# EAGLE board SOIC14-TSSOP14 v1.0 (EAGLE 7.2.0)
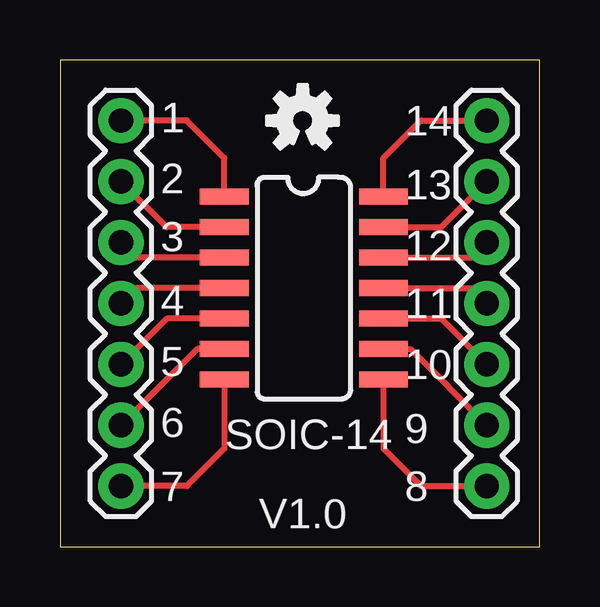
[diagram p0: board, top side]
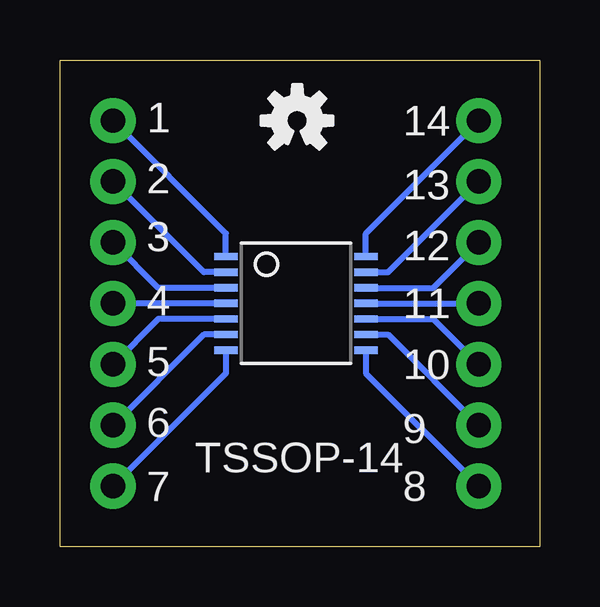
[diagram p1: board, bottom side, seen from below]

Size 19.99 x 20.31 mm. Coordinates in mm from the lower left corner, seen from the top.
Outline: 0,0 19.99,0 19.99,20.31 0,20.31 0,0
Copper layers (1*16): Top 0.035mm / dielectric 1.5mm / Bottom 0.035mm
Design rules "dirt_cheap_dirty_boards.v1": minimum track width 5mil, minimum drill 12mil, track to track 5mil, track to pad 5mil, pad to pad 5mil, via to via 5mil, smd to smd 0mil, copper to edge 10mil, drill to drill 10mil, minimum pad ring 10mil, minimum via ring 6mil, stop-mask expansion 2mil, vias tented up to drill 25mil, thermal gap 10mil

## Footprints (pad centres in the part's own frame; a part is rotated, then mirrored left to right if it is on the bottom)
1X07 = drill 1.016 pad 1.88: 1 0,0; 2 2.54,0; 3 5.08,0; 4 7.62,0; 5 10.16,0; 6 12.7,0; 7 15.24,0
SOIC-14 = smd 0.66 x 2.032: 1 -4.445,-3.315; 2 -3.175,-3.315; 3 -1.905,-3.315; 4 -0.635,-3.315; 5 0.635,-3.315; 6 1.905,-3.315; 7 3.175,-3.315; 8 3.175,3.315; 9 1.905,3.315; 10 0.635,3.315; 11 -0.635,3.315; 12 -1.905,3.315; 13 -3.175,3.315; 14 -4.445,3.315
TSSOP14 = smd 0.305 x 0.991: 1 -1.95,-2.918; 2 -1.3,-2.918; 3 -0.65,-2.918; 4 0,-2.918; 5 0.65,-2.918; 6 1.3,-2.918; 7 1.95,-2.918; 8 1.95,2.918; 9 1.3,2.918; 10 0.65,2.918; 11 0,2.918; 12 -0.65,2.918; 13 -1.3,2.918; 14 -1.95,2.918

## Placement (x,y rotation side)
FRAME1  FRAME-LETTER  [CREATIVE_COMMONS]  -9.65,-10.36 0 top  (outside the outline)
JP1  [1X07]  2.54,2.54 90 top
JP2  [1X07]  17.78,2.54 90 top
U$1  SOIC-14  [SOIC-14]  10.16,10.16 270 top
U$2  TSSOP-14  [TSSOP14]  10.16,10.16 270 bottom
U$3  [OSHW-LOGO-S]  10.11,17.78 0 top
U$4  [OSHW-LOGO-S]  10.11,17.78 0 bottom

## Library data of the parts
FRAME1 U$3 U$4 = SparkFun-Aesthetics
JP1 JP2 = SparkFun-Connectors
U$1 U$2 = Kevin-GenericICFootprints

## Nets
N$1: JP1.7 U$1.1 U$2.14
N$2: JP1.6 U$1.2 U$2.13
N$3: JP1.5 U$1.3 U$2.12
N$4: JP1.4 U$1.4 U$2.11
N$5: JP1.3 U$1.5 U$2.10
N$6: JP1.2 U$1.6 U$2.9
N$7: JP1.1 U$1.7 U$2.8
N$11: JP2.7 U$1.14 U$2.1
N$12: JP2.6 U$1.13 U$2.2
N$13: JP2.5 U$1.12 U$2.3
N$14: JP2.4 U$1.11 U$2.4
N$15: JP2.3 U$1.10 U$2.5
N$16: JP2.2 U$1.9 U$2.6
N$17: JP2.1 U$1.8 U$2.7

## Tracks (layer width: path | path; a pad name or v marks a point on that pad's centre or on a via)
N$1
  Top 0.254: U$1.1 6.84,16.22 5.28,17.78 JP1.7
  Bottom 0.254: U$2.14 7.24,13.08 JP1.7
N$2
  Top 0.254: U$1.2 4.45,13.33 JP1.6
  Bottom 0.254: U$2.13 6.32,11.46 JP1.6
N$3
  Top 0.254: U$1.3 3.17,12.06 JP1.5
  Bottom 0.254: U$2.12 4.43,10.81 JP1.5
N$4
  Top 0.254: U$1.4 3.17,10.79 JP1.4
  Bottom 0.254: U$2.11 JP1.4
N$5
  Top 0.254: U$1.5 4.45,9.52 JP1.3
  Bottom 0.254: U$2.10 4.43,9.51 JP1.3
N$6
  Top 0.254: U$1.6 5.71,8.25 JP1.2
  Bottom 0.254: U$2.9 6.32,8.86 JP1.2
N$7
  Top 0.254: U$1.7 6.84,4.1 5.28,2.54 JP1.1
  Bottom 0.254: U$2.8 7.24,7.24 JP1.1
N$11
  Top 0.254: U$1.14 13.47,16.22 15.04,17.78 JP2.7
  Bottom 0.254: U$2.1 13.08,13.08 JP2.7
N$12
  Top 0.254: U$1.13 15.88,13.33 JP2.6
  Bottom 0.254: U$2.2 14,11.46 JP2.6
N$13
  Top 0.254: U$1.12 17.14,12.06 JP2.5
  Bottom 0.254: U$2.3 15.89,10.81 JP2.5
N$14
  Top 0.254: U$1.11 17.14,10.79 JP2.4
  Bottom 0.254: U$2.4 JP2.4
N$15
  Top 0.254: U$1.10 15.88,9.52 JP2.3
  Bottom 0.254: U$2.5 15.89,9.51 JP2.3
N$16
  Top 0.254: U$1.9 14.61,8.25 JP2.2
  Bottom 0.254: U$2.6 14,8.86 JP2.2
N$17
  Top 0.254: U$1.8 13.47,4.1 15.04,2.54 JP2.1
  Bottom 0.254: U$2.7 13.08,7.24 JP2.1

## Text on the board
tPlace: 1 | 14 | 2 | 13 | 3 | 12 | 4 | 11 | 5 | 10 | 6 | SOIC-14 | 9 | 7 | 8 | V1.0
bPlace: 14 | 1 | 13 | 2 | 12 | 3 | 11 | 4 | 10 | 5 | 9 | 6 | TSSOP-14 | 8 | 7
tDocu: Kevin Neubauer